# EAGLE board 17+ (EAGLE 9.5.2)
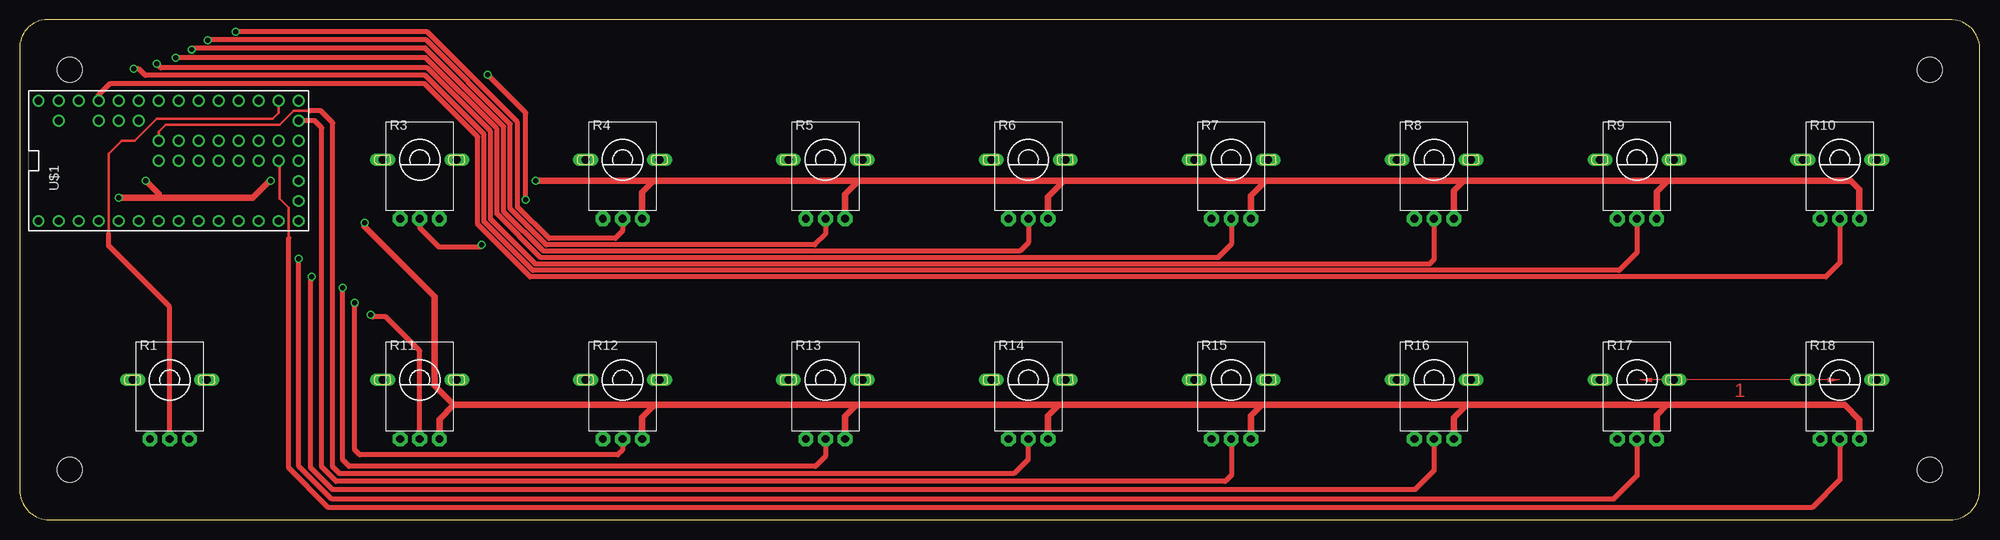
[diagram p0: board, top side]
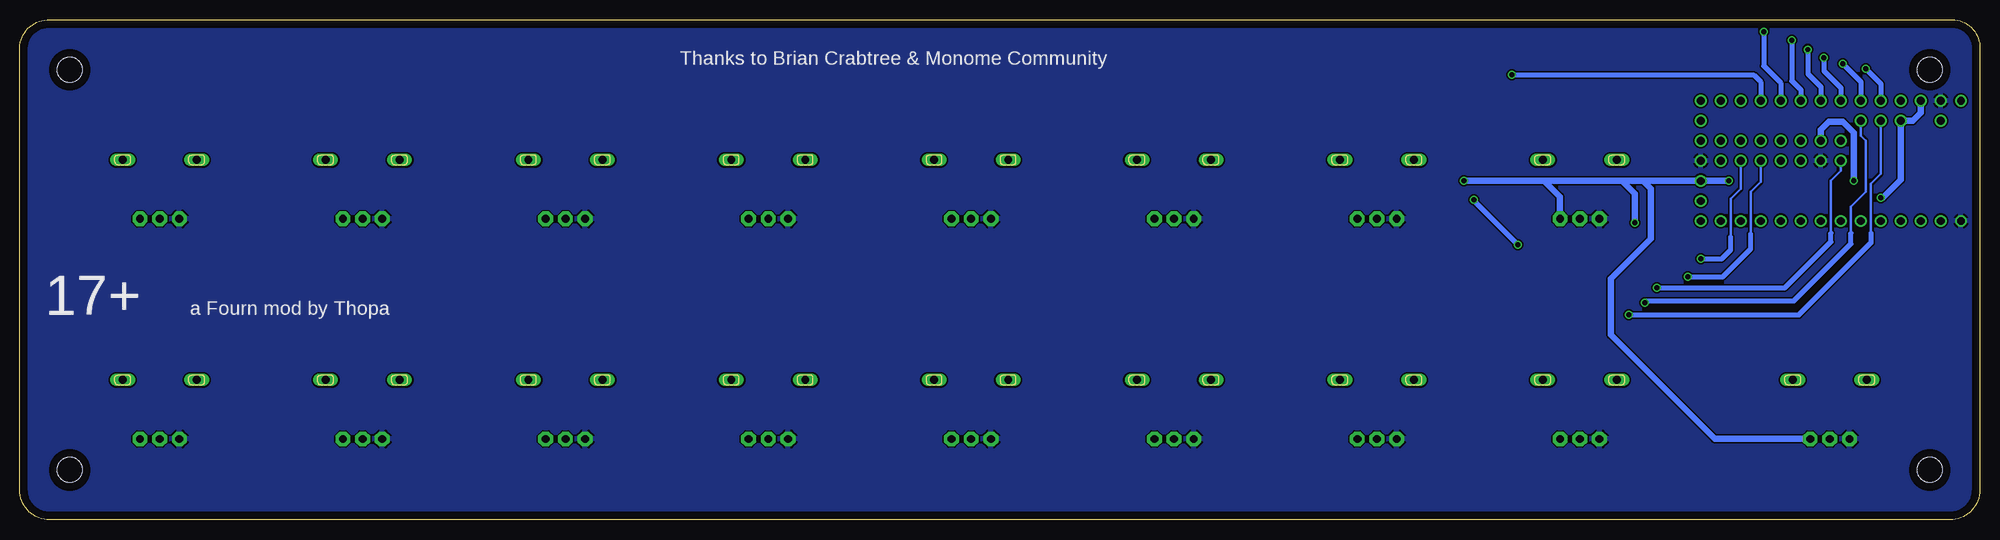
[diagram p1: board, bottom side, seen from below]

Size 248.92 x 63.51 mm. Coordinates in mm from the lower left corner, seen from the top.
Outline: 248.92,3.81 248.92,59.94 arc90 245.11,63.5 3.81,63.5 arc90 0,60.2 0,3.81 arc90 3.81,0 245.11,0 arc90 248.92,3.81
Copper layers (1*16): Top 0.035mm / dielectric 1.5mm / Bottom 0.035mm
Design rules "default": minimum track width 10mil, minimum drill 24mil, track to track 8mil, track to pad 8mil, pad to pad 8mil, via to via 8mil, smd to smd 8mil, copper to edge 40mil, drill to drill 8mil, minimum pad ring 10mil, minimum via ring 8mil, stop-mask expansion 4mil, vias tented up to drill 0mil, thermal gap 10mil
Holes 3.2 mm at 6.35,6.35 242.57,6.35 242.57,57.15 6.35,57.15

## Footprints (pad centres in the part's own frame; a part is rotated, then mirrored left to right if it is on the bottom)
SHAPES_POT-ALPS_ALPS_POT_VERTICAL_PS = drill 1 pad 1.88 octagon: P$1 -2.5,7.5; P$2 0,7.5; P$3 2.5,7.5 | drill 1 pad 1.6 long: P$4 -4.7,0; P$5 4.7,0
TEENSY_3.1_ALLPINS = drill 0.965: 0 -7.62,15.24; 1 -7.62,12.7; 2 -7.62,10.16; 3 -7.62,7.62; 3.3V 7.62,12.7; 3.3V1 -2.54,-15.24; 3.3V2 2.54,0; 4 -7.62,5.08; 5 -7.62,2.54; 6 -7.62,0; 7 -7.62,-2.54; 8 -7.62,-5.08; 9 -7.62,-7.62; 10 -7.62,-10.16; 11 -7.62,-12.7; 12 -7.62,-15.24; 13 7.62,-15.24; 14/A0 7.62,-12.7; 15/A1 7.62,-10.16; 16/A2 7.62,-7.62; 17/A3 7.62,-5.08; 18/A4 7.62,-2.54; 19/A5 7.62,0; 20/A6 7.62,2.54; 21/A7 7.62,5.08; 22/A8 7.62,7.62; 23/A9 7.62,10.16; 24 0,-2.54; 25 0,-5.08; 26 0,-7.62; 27 0,-10.16; 28 0,-12.7; 29 2.54,-12.7; 30 2.54,-10.16; 31 2.54,-7.62; 32 2.54,-5.08; 33 2.54,-2.54; A10 5.08,7.62; A11 5.08,5.08; A12 0,2.54; A13 2.54,2.54; A14 5.08,-15.24; AGND 7.62,15.24; AREF 5.08,10.16; GND -7.62,17.78; GND1 0,-15.24; GND2 0,0; PGM 2.54,-15.24; VBAT -5.08,-15.24; VIN 7.62,17.78; VUSB 5.08,15.24

## Placement (x,y rotation side)
R1  [SHAPES_POT-ALPS_ALPS_POT_VERTICAL_PS]  19.05,17.78 180 top
R3  [SHAPES_POT-ALPS_ALPS_POT_VERTICAL_PS]  50.8,45.72 180 top
R4  [SHAPES_POT-ALPS_ALPS_POT_VERTICAL_PS]  76.56,45.72 180 top
R5  [SHAPES_POT-ALPS_ALPS_POT_VERTICAL_PS]  102.33,45.72 180 top
R6  [SHAPES_POT-ALPS_ALPS_POT_VERTICAL_PS]  128.09,45.72 180 top
R7  [SHAPES_POT-ALPS_ALPS_POT_VERTICAL_PS]  153.85,45.72 180 top
R8  [SHAPES_POT-ALPS_ALPS_POT_VERTICAL_PS]  179.61,45.72 180 top
R9  [SHAPES_POT-ALPS_ALPS_POT_VERTICAL_PS]  205.38,45.72 180 top
R10  [SHAPES_POT-ALPS_ALPS_POT_VERTICAL_PS]  231.14,45.72 180 top
R11  [SHAPES_POT-ALPS_ALPS_POT_VERTICAL_PS]  50.8,17.78 180 top
R12  [SHAPES_POT-ALPS_ALPS_POT_VERTICAL_PS]  76.56,17.78 180 top
R13  [SHAPES_POT-ALPS_ALPS_POT_VERTICAL_PS]  102.33,17.78 180 top
R14  [SHAPES_POT-ALPS_ALPS_POT_VERTICAL_PS]  128.09,17.78 180 top
R15  [SHAPES_POT-ALPS_ALPS_POT_VERTICAL_PS]  153.85,17.78 180 top
R16  [SHAPES_POT-ALPS_ALPS_POT_VERTICAL_PS]  179.61,17.78 180 top
R17  [SHAPES_POT-ALPS_ALPS_POT_VERTICAL_PS]  205.38,17.78 180 top
R18  [SHAPES_POT-ALPS_ALPS_POT_VERTICAL_PS]  231.14,17.78 180 top
U$1  TEENSY_3.1_ALL_PINS_AND_PADS  [TEENSY_3.1_ALLPINS]  20.19,45.59 90 top

## Library data of the parts
R1 R3-R18 = monome_modular
U$1 = Teensy_3_Series_Board_v1.0

## Nets
+3V3: R1.P$1 R3.P$1 R4.P$1 R5.P$1 R6.P$1 R7.P$1 R8.P$1 R9.P$1 R10.P$1 R11.P$1 R12.P$1 R13.P$1 R14.P$1 R15.P$1 R16.P$1 R17.P$1 R18.P$1 U$1.3.3V U$1.3.3V1 U$1.3.3V2 U$1.AREF
A0: R1.P$2 U$1.14/A0
A1: U$1.15/A1
A2: R3.P$2 U$1.16/A2
A3: R4.P$2 U$1.17/A3
A4: R5.P$2 U$1.18/A4
A5: R6.P$2 U$1.19/A5
A6: R7.P$2 U$1.20/A6
A7: R8.P$2 U$1.21/A7
A8: R9.P$2 U$1.22/A8
A9: R10.P$2 U$1.23/A9
A10: R11.P$2 U$1.A10
A11: R12.P$2 U$1.A11
A12: R13.P$2 U$1.A12
A13: R14.P$2 U$1.A13
A14: R15.P$2 U$1.A14
A15: R16.P$2 U$1.26
A16: R17.P$2 U$1.27
A17: R18.P$2 U$1.28
A18: U$1.29
A19: U$1.30
A20: U$1.31
GND: R1.P$3 R3.P$3 R4.P$3 R5.P$3 R6.P$3 R7.P$3 R8.P$3 R9.P$3 R10.P$3 R11.P$3 R12.P$3 R13.P$3 R14.P$3 R15.P$3 R16.P$3 R17.P$3 R18.P$3 U$1.AGND U$1.GND U$1.GND1 U$1.GND2
VBAT: U$1.VBAT
VIN: U$1.VIN
VUSB: U$1.VUSB

## Tracks (layer width: path | path; a pad name or v marks a point on that pad's centre or on a via)
+3V3  (via drill 0.61)
  Top 0.813: R10.P$1 233.64,41.95 232.54,43.05 209.3,43.05 | R18.P$1 233.64,12.74 231.78,14.61 209.17,14.61 | 209.17,14.61 183.77,14.61 | 183.77,14.61 157.73,14.61 | 157.73,14.61 131.95,14.61 | 131.95,14.61 106.3,14.61 | 106.3,14.61 80.64,14.61 | 80.64,14.61 55.12,14.61 | 209.3,43.05 183.39,43.05 | 183.39,43.05 158.24,43.05 | 158.24,43.05 132.59,43.05 | 132.59,43.05 106.55,43.05 | 106.55,43.05 80.52,43.05 | R4.P$1 79.06,41.6 80.52,43.05 | R5.P$1 104.83,41.33 106.55,43.05 | R6.P$1 130.59,41.05 132.59,43.05 | R7.P$1 156.35,41.16 158.24,43.05 | R8.P$1 182.11,41.78 183.39,43.05 | R9.P$1 207.88,41.63 209.3,43.05 | R11.P$1 53.3,12.79 55.12,14.61 | R12.P$1 79.06,13.02 80.64,14.61 | R13.P$1 104.83,13.13 106.3,14.61 | R14.P$1 130.59,13.24 131.95,14.61 | R15.P$1 156.35,13.22 157.73,14.61 | R16.P$1 182.11,12.95 183.77,14.61 | R17.P$1 207.88,13.31 209.17,14.61 | 80.52,43.05 v65.53,43.05 | 55.12,14.61 52.7,17.02 52.7,28.32 43.81,37.21 v43.81,37.72 | v12.57,40.89 17.65,40.89 | 17.65,40.89 29.59,40.89 31.75,43.05 v31.88,43.05 | v16,43.05 17.65,41.4 17.65,40.89
  Bottom 0.813: v65.53,43.05 55.24,43.05 | 55.24,43.05 45.47,43.05 | 45.47,43.05 42.8,43.05 | 42.8,43.05 U$1.3.3V1 v31.88,43.05 | R3.P$1 53.34,38.26 53.34,41.02 55.24,42.93 55.24,43.05 | v43.81,37.72 43.81,41.4 45.47,43.05 | R1.P$1 33.65,10.28 46.86,23.5 46.86,30.61 41.78,35.69 41.78,42.04 42.8,43.05 | U$1.3.3V 7.49,51.69 8.51,50.67 U$1.AREF 10.03,43.18 12.32,40.89 v12.57,40.89 | U$1.3.3V2 20.19,49.53 19.18,50.55 17.4,50.55 16,49.15 v16,43.05
A0
  Top 0.305: 11.3,36.32 11.3,46.48 12.95,48.13 14.61,48.13 17.4,50.93 32.13,50.93 32.89,51.69 U$1.14/A0
  Top 0.61: R1.P$2 19.05,27.05 11.3,34.8 11.3,36.32
A2  (via drill 0.61)
  Top 0.61: R3.P$2 50.8,37.08 53.21,34.67 58.55,34.67 58.55,34.8 v58.67,34.92 | v64.26,40.64 64.26,51.69 v59.44,56.52
  Bottom 0.61: v58.67,34.92 64.26,40.51 64.39,40.51 v64.26,40.64 | v59.44,56.52 28.7,56.52 27.81,55.63 U$1.16/A2
A3  (via drill 0.61)
  Top 0.61: R4.P$2 76.56,36.69 75.62,35.74 67.2,35.74 63.22,39.72 63.22,50.48 51.73,61.98 v27.43,61.98
  Bottom 0.61: v27.43,61.98 27.43,57.66 25.27,55.5 U$1.17/A3
A4  (via drill 0.61)
  Top 0.61: R5.P$2 102.33,36.29 100.97,34.92 66.87,34.92 62.3,39.5 62.3,50.26 51.59,60.96 23.95,60.96 23.9,60.91 v23.88,60.91
  Bottom 0.61: v23.88,60.91 23.88,55.75 22.73,54.61 U$1.18/A4
A5  (via drill 0.61)
  Top 0.61: R6.P$2 128.09,35.2 127,34.11 66.5,34.11 61.48,39.13 61.48,49.92 51.51,59.89 22.02,59.89 v21.84,59.72
  Bottom 0.61: v21.84,59.72 21.84,56.64 20.19,54.99 U$1.19/A5
A6  (via drill 0.61)
  Top 0.61: R7.P$2 153.85,34.98 152.17,33.3 66.17,33.3 60.6,38.86 60.6,49.65 51.56,58.7 19.84,58.7 19.86,58.67 v19.81,58.67
  Bottom 0.61: v19.81,58.67 19.81,57.02 17.65,54.86 U$1.20/A6
A7  (via drill 0.61)
  Top 0.61: R8.P$2 179.61,33.06 179.04,32.49 65.49,32.49 59.79,38.18 59.79,49.31 51.73,57.38 17.93,57.38 v17.4,57.91
  Bottom 0.61: v17.4,57.91 15.11,55.63 U$1.21/A7
A8  (via drill 0.61)
  Top 0.61: R9.P$2 205.38,33.93 203.12,31.67 65.15,31.67 58.98,37.85 58.98,48.98 51.52,56.44 15.95,56.44 15.11,57.28 v14.48,57.28
  Bottom 0.61: v14.48,57.28 12.57,55.37 U$1.22/A8
A9
  Top 0.61: R10.P$2 231.14,32.64 229.36,30.86 64.81,30.86 58.17,37.51 58.17,48.64 51.44,55.37 11.43,55.37 10.03,53.98 U$1.23/A9
A10  (via drill 0.61)
  Top 0.61: R11.P$2 50.8,21.46 46.48,25.78 44.83,25.78 v44.58,26.04
  Bottom 0.305: 13.84,36.45 13.84,42.67 12.57,43.94 U$1.A10
  Bottom 0.61: v44.58,26.04 22.99,26.04 13.84,35.18 13.84,36.45
A11  (via drill 0.61)
  Top 0.61: R12.P$2 76.56,8.87 75.95,8.26 43.18,8.26 42.55,8.89 42.55,27.18 42.67,27.3 42.55,27.43 v42.55,27.56
  Bottom 0.305: 16.38,36.45 16.38,39.75 14.48,41.66 14.48,48.13 15.11,48.77 U$1.A11
  Bottom 0.61: v42.55,27.56 42.29,27.81 23.62,27.81 16.38,35.05 16.38,36.45
A12  (via drill 0.61)
  Top 0.61: R13.P$2 102.33,8.09 101.04,6.81 41.83,6.81 41.02,7.62 v41.02,29.46
  Bottom 0.305: 18.92,36.45 18.92,43.05 17.65,44.32 U$1.A12
  Bottom 0.61: v41.02,29.46 24.77,29.46 18.92,35.31 18.92,36.45
A13
  Top 0.305: 36.83,51.94 34.8,51.94 33.02,50.16 18.54,50.16 17.65,49.28 U$1.A13
  Top 0.61: R14.P$2 128.09,7.72 126.24,5.87 40.62,5.87 39.75,6.73 39.75,50.42 38.23,51.94 36.83,51.94
A14
  Top 0.61: R15.P$2 153.85,5.64 153.11,4.9 40.18,4.9 38.35,6.73 38.35,49.78 37.47,50.67 U$1.A14
A15  (via drill 0.61)
  Top 0.61: R16.P$2 179.61,6.26 177.19,3.83 39.73,3.83 36.96,6.6 36.96,30.48 37.08,30.61 v37.08,30.86
  Bottom 0.305: 29.08,36.32 29.08,41.66 27.81,42.93 U$1.26
  Bottom 0.61: v37.08,30.86 32.64,30.86 29.08,34.42 29.08,36.32
A16  (via drill 0.61)
  Top 0.61: R17.P$2 205.38,5.61 202.41,2.64 82.07,2.64 | 82.07,2.64 82.04,2.67 | 82.07,2.64 39.62,2.64 35.43,6.83 v35.43,33.15
  Bottom 0.305: 31.62,35.94 31.62,40.77 30.35,42.04 U$1.27
  Bottom 0.61: v35.43,33.15 32.77,33.15 31.62,34.29 31.62,35.94
A17
  Top 0.305: 34.16,35.81 34.16,39.62 33.02,40.77 33.02,45.47 U$1.28
  Top 0.61: R18.P$2 231.14,5.08 227.63,1.57 39.19,1.57 34.16,6.6 34.16,35.81
GND
  pour Bottom: 0,0 248.92,0 248.92,63.5 0,63.5
(copper drawn outside any net)
  shapes: Top area x3

## Text on the board
bNames: Thanks to Brian Crabtree & Monome Community | a Fourn mod by Thopa | 17+